# Altium PCB GPIOmodule.PcbDoc
Units mm, origin at the board's own origin, x right, y up, seen from the top; angles counter-clockwise.
Board outline 106.98 x 52.1 mm, 2 copper layers (Top Layer, Bottom Layer), stack 1.58 mm thick; 38 components, 54 nets, 222 pads, 24 vias.
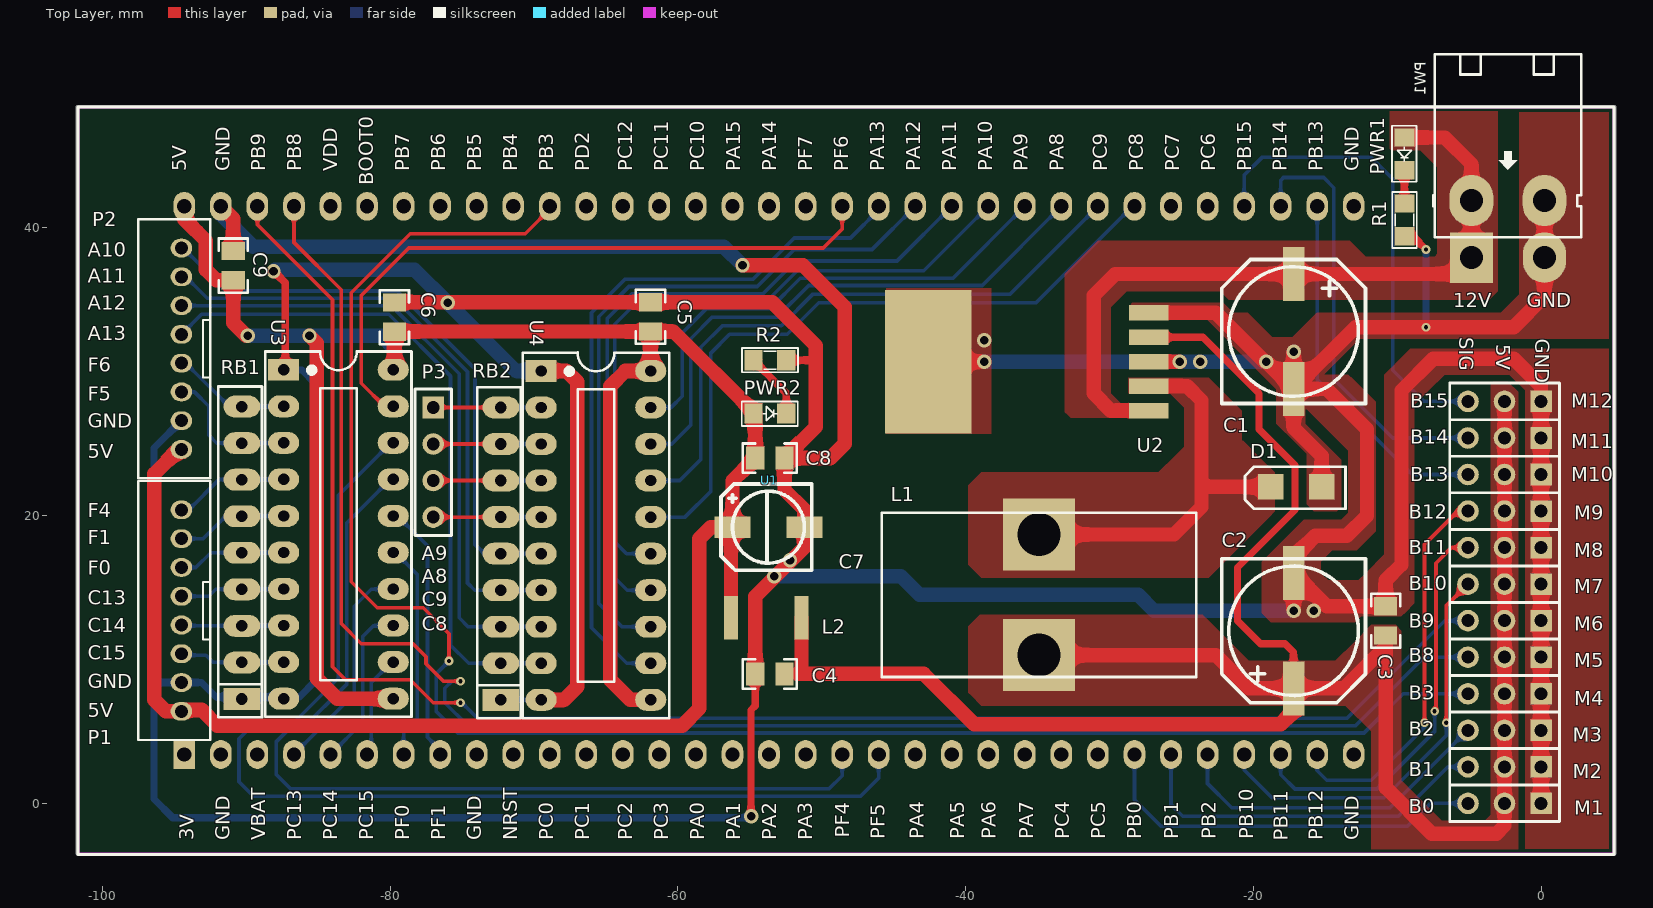
[diagram p0: Top Layer view]
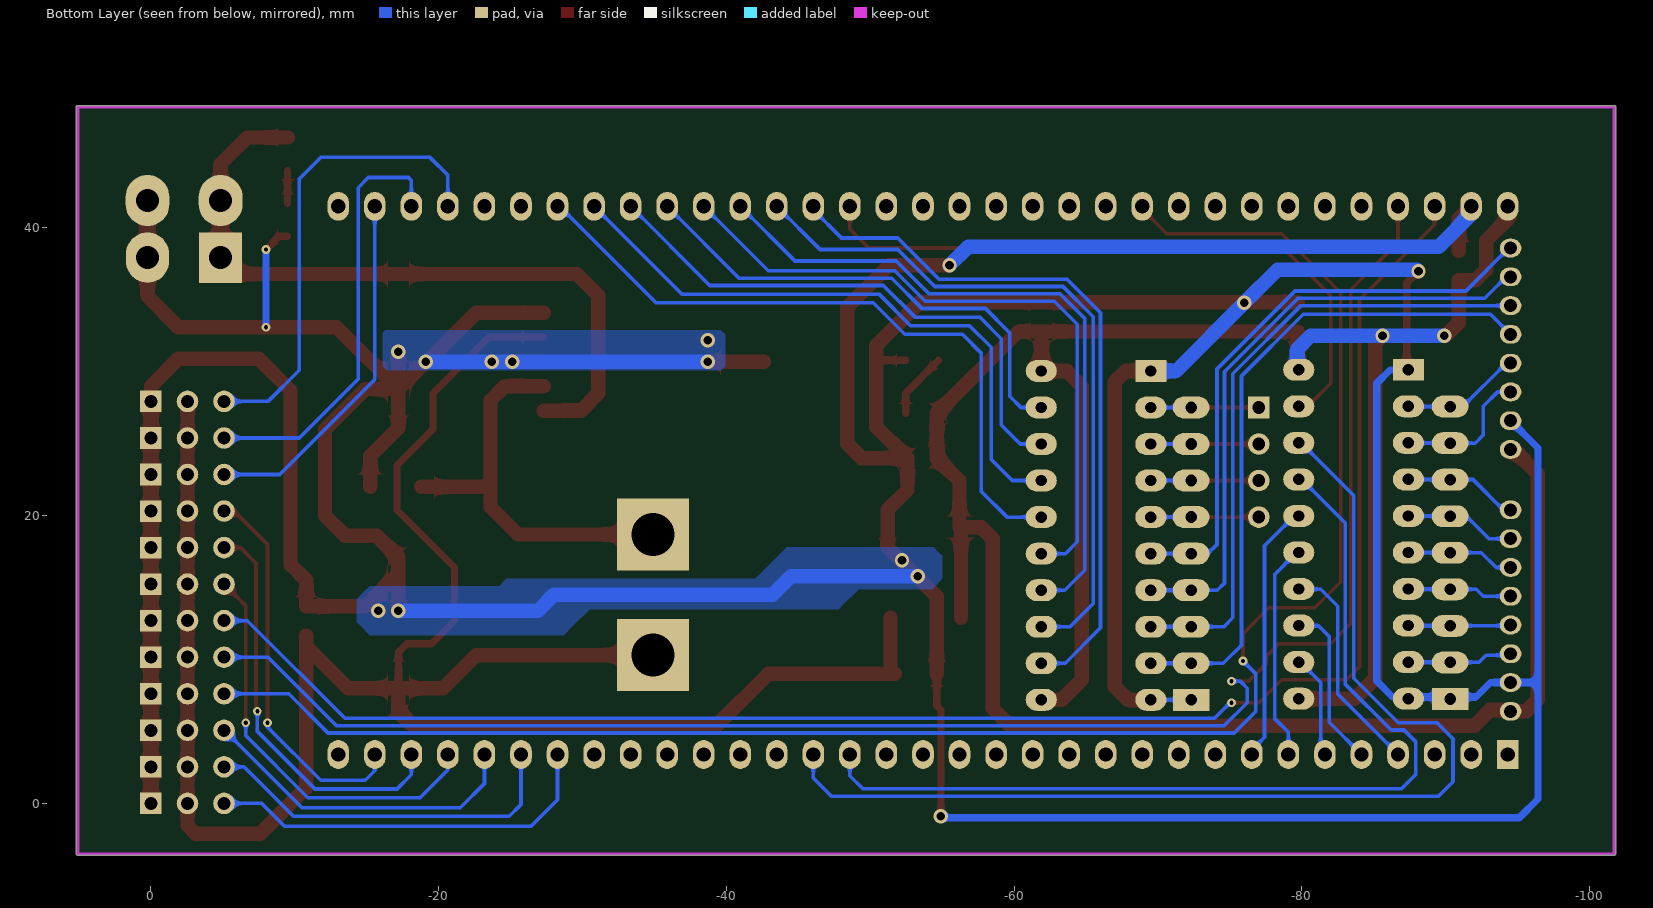
[diagram p1: Bottom Layer view, seen from below]

## Layer stack, top to bottom
Top Solder: solder mask 0.0102, Solder Resist, Dk 3.5
Top Layer: signal copper 0.0356
Dielectric 1: dielectric 1.5086, FR-4, Dk 4.8
Bottom Layer: signal copper 0.0356
Bottom Solder: solder mask 0.0102, Solder Resist, Dk 3.5

## Board outline
-101.7,-3.602 cw(c-101.7,-3.5) -101.8,-3.482 -101.8,48.382 cw(c-101.7,48.4) -101.7,48.502 5.08,48.502 cw(c5.08,48.4) 5.182,48.4 5.182,-3.5 cw(c5.08,-3.5) 5.08,-3.602

## Design rules (kind name [scope] priority, off if disabled: settings)
Clearance Clearance_1 [InNet('GND')] p1: gap=0.254
Clearance cutout [IsRegion] p2: gap=0.2
Clearance keepout [OnLayer('Keep-Out Layer')] p3: gap=0.2
Clearance [All] p4: gap=0.254
HoleSize [All] p1: absolutevalues=TRUE maxlimit=5 minlimit=0.01 maxpercent=80.000 minpercent=20.000
MinimumSolderMaskSliver [All] p1: minsoldermaskwidth=0.01
PolygonConnect [All] p1: connectstyle=Direct reliefconductorwidth=0.254 reliefentries=4 polygonreliefangle="90 Angle" airgapwidth=0.254
RoutingVias [All] p1: holewidth=0.3 width=0.6 viastyle="Through Hole" minholewidth=0.3 minwidth=0.6 maxholewidth=5 maxwidth=5
SilkToSilkClearance [All] p1: silktosilkclearance=0.1
SilkToSolderMaskClearance [IsPad] p1: minsilkscreentomaskgap=0.01 clearancetoexposedcopper=TRUE
SolderMaskExpansion [All] p1: expansion=0.102
Width [All] p1: maxlimit=5 minlimit=0.254 preferedwidth=0.254
26 further rules are at their usual default settings.

## Components (designator, comment, footprint, x,y, rotation, side; value= is the part's Value field where it differs from the comment)
C1 "470uF" TU_NHOM_470uF_25V_MH -17.2,32.8 r180 top
C2 "470uF" TU_NHOM_470uF_25V_MH -17.2,12 r0 top
C3 "104" 0805_HV -10.8,12.684 r270 top
C4 "104" 0805_HV -53.6,9 r0 top
C5 "104" 0805_HV -61.9,33.816 r270 top
C6 "104" 0805_HV -79.7,33.8 r270 top
C7 "220uF" TU_NHOM_2.5_MH -53.7,19.2 r90 top
C8 "104" 0805_HV -53.6,24 r180 top
C9 "104" 0805_HV -90.9,37.384 r270 top
D1 "IN5822" SOD123 -16.133,21.365 r0 top
L1 "100uF" IND_2118-V-RC -34.9,14.5 r270 top locked
L2 "680uF" "Inductor 4.5x5" -53.6,13 r0 top
M1 "Header 3" HDR1X3 0,0 r180 top
M2 "Header 3" HDR1X3 0,2.54 r180 top
M3 "Header 3" HDR1X3 0,5.08 r180 top
M4 "Header 3" HDR1X3 0,7.62 r180 top
M5 "Header 3" HDR1X3 0,10.16 r180 top
M6 "Header 3" HDR1X3 0,12.7 r180 top
M7 "Header 3" HDR1X3 0,15.24 r180 top
M8 "Header 3" HDR1X3 0,17.78 r180 top
M9 "Header 3" HDR1X3 0,20.32 r180 top
M10 "Header 3" HDR1X3 0,22.86 r180 top locked
M11 "Header 3" HDR1X3 0,25.4 r180 top locked
M12 "Header 3" HDR1X3 0,27.94 r180 top locked
P1 "Header 8" HEADER2M_8P -94.5,13.4 r90 top locked
P2 "Header 8" HEADER2M_8P -94.5,31.6 r90 top locked
P3 "Header 4" HDR1X4 -77,27.52 r270 top
PW1 "CON 2 EDG 5.08_MH" "CON 2 EDG 5.08" -2.3,41.9 r0 top (schematic designator CON1)
PWR1 "LED3" LED_0805 -9.5,45.143 r270 top
PWR2 "LED3" LED_0805 -53.6,27.1 r0 top
R1 "2.2K" "Tro SMD 0805" -9.5,40.557 r90 top
R2 "2.2K" "Tro SMD 0805" -53.6,30.8 r180 top
RB1 "TRO_BANG_A09_MH" TRO_BANG_A09 -90.3,17.42 r90 top locked
RB2 "TRO_BANG_A09_MH" TRO_BANG_A09 -72.3,17.36 r90 top
U1 "STM32discovery" STM32discovery_kit -53.66,22.45 r0 top locked
U2 "LM2576HVS" TO263-5 -27.3,30.7 r90 top locked
U3 "74HC573" DIP20 -83.615,18.71 r270 top
U4 "74HC573" DIP20 -65.715,18.63 r270 top

## Footprints (in the part's own frame and the unit in brackets; to place one, negate y for a bottom-side part, rotate by r counter-clockwise, add the part's x,y. Pads: shape width x height; smd on the part's side, far side on the other; paste and mask are expansions set on the pad)
0805_HV [mil] "0805 with 30mil clearance between pads"
  rect 50x63 smd: 1(-40,0) 2(40,0)
  silkscreen extent -74,-40 74,40, body extent -43,-29 43,29, height 57
"CON 2 EDG 5.08" [mil]
  oval 120x140 hole 62.99: 1(-100,0) 2(100,0)
  silkscreen extent -205,-100 200,400, body extent -197,-73 197,399, height 79
DIP20 [mil]
  rect 60x85 hole 31: 1(-450,-149)
  oval 60x85 hole 31: 2(-350,-149) 3(-250,-149) 4(-150,-149) 5(-50,-149) 6(50,-149) 7(150,-149) 8(250,-149) 9(350,-149) 10(450,-149) 11(450,151) 12(350,151) 13(250,151) 14(150,151) 15(50,151) 16(-50,151) 17(-150,151) 18(-250,151) 19(-350,151) 20(-450,151)
  silkscreen extent -500,-199 500,201, body extent -541,-167 495,173, height 155
HDR1X3 [mm] "Connector; Header; 3 Position"
  rect 1.5x1.5 hole 0.9: 1(0,0)
  round 1.5 hole 0.9: 2(2.54,0) 3(5.08,0)
  silkscreen extent -1.27,-1.27 6.35,1.27
HDR1X4 [mm] "Connector; Header; 4 Position"
  rect 1.5x1.5 hole 0.9: 1(0,0)
  round 1.5 hole 0.9: 2(2.54,0) 3(5.08,0) 4(7.62,0)
  silkscreen extent -1.27,-1.27 8.89,1.27
HEADER2M_8P [mm]
  oval 1.3x1.5 hole 0.9 mask+0.001: 1(-7,0) 2(-5,0) 3(-3,0) 4(-1,0) 5(1,0) 6(3,0) 7(5,0) 8(7,0)
  silkscreen extent -9,-2 9,3
IND_2118-V-RC [mm] "INDUCTOR,2 LEAD,VERTICAL MOUNT,8.382mm PITCH,TH"
  rect 5x5 hole 3: 1(-4.191,0) 2(4.191,0)
  silkscreen extent -5.72,-10.92 5.72,10.92, body extent -5.72,-10.92 5.72,10.92, height 21.84
"Inductor 4.5x5" [mm]
  rect 1x3 smd: 1(2.2,-0.1) 2(-2.7,-0.1)
  body extent -2.6,-2.6 2.2,2.2, height 2
LED_0805 [mil]
  rect 50x55 smd: 1(-45,0) 2(45,0)
  silkscreen extent -77,-34 76,33, body extent -41,-16 41,20, height 33
SOD123 [mil]
  rect 70x70 smd: 1(35,25) 2(-105,25)
  silkscreen extent -175,-35 100,80, body extent -139,-29 66,73, height 95
STM32discovery_kit [mm]
  rect 1.5x2 hole 1 paste+0: 1(-40.64,-19.05)
  oval 1.5x2 hole 1 paste+0: 2(-38.1,-19.05) 3(-35.56,-19.05) 4(-33.02,-19.05) 5(-30.48,-19.05) 6(-27.94,-19.05) 7(-25.4,-19.05) 8(-22.86,-19.05) 9(-20.32,-19.05) 10(-17.78,-19.05) 11(-15.24,-19.05) 12(-12.7,-19.05) 13(-10.16,-19.05) 14(-7.62,-19.05) 15(-5.08,-19.05) 16(-2.54,-19.05) 17(0,-19.05) 18(2.54,-19.05) 19(5.08,-19.05) 20(7.62,-19.05) 21(10.16,-19.05) 22(12.7,-19.05) 23(15.24,-19.05) 24(17.78,-19.05) 25(20.32,-19.05) 26(22.86,-19.05) 27(25.4,-19.05) 28(27.94,-19.05) 29(30.48,-19.05) 30(33.02,-19.05) 31(35.56,-19.05) 32(38.1,-19.05) 33(40.64,-19.05) 34(40.64,19.05) 35(38.1,19.05) 36(35.56,19.05) 37(33.02,19.05) 38(30.48,19.05) 39(27.94,19.05) 40(25.4,19.05) 41(22.86,19.05) 42(20.32,19.05) 43(17.78,19.05) 44(15.24,19.05) 45(12.7,19.05) 46(10.16,19.05) 47(7.62,19.05) 48(5.08,19.05) 49(2.54,19.05) 50(0,19.05) 51(-2.54,19.05) 52(-5.08,19.05) 53(-7.62,19.05) 54(-10.16,19.05) 55(-12.7,19.05) 56(-15.24,19.05) 57(-17.78,19.05) 58(-20.32,19.05) 59(-22.86,19.05) 60(-25.4,19.05) 61(-27.94,19.05) 62(-30.48,19.05) 63(-33.02,19.05) 64(-35.56,19.05) 65(-38.1,19.05) 66(-40.64,19.05)
  silkscreen extent -48.04,-26 58.74,25.95
TO263-5 [mm] "LM2576-SMD"
  rect 1.07x2.75 smd: 1(-3.4,-0.025) 2(-1.7,-0.025) 3(0,-0.025) 4(1.7,-0.025) 5(3.4,-0.025)
  rect 10x6 smd: 6(0,15.289)
  body extent -5,-0.38 5,15.29, height 4.79
"Tro SMD 0805" [mil]
  rect 50x55 smd: 1(-45,0) 2(45,0)
  silkscreen extent -77,-34 76,33, body extent -62,-28 56,27, height 21
TRO_BANG_A09 [mil] "R SIP8, 9 Pin"
  rect 60x100 hole 32: 1(-400,0)
  oval 60x100 hole 32: 2(-300,0) 3(-200,0) 4(-100,0) 5(0,0) 6(100,0) 7(200,0) 8(300,0) 9(400,0)
  silkscreen extent -450,-55 455,65, body extent -443,-44 443,5, height 259
TU_NHOM_2.5_MH [mm]
  rect 1.5x2.5 smd: 1(0,2.5) 2(0,-2.5)
  silkscreen extent -3,-3 3,3.3, body extent -3.3,-3.5 3.3,3.5, height 8.11
TU_NHOM_470uF_25V_MH [mm]
  rect 1.5x3.75 smd: 1(0,-4) 2(0,4)
  silkscreen extent -5,-5 5,5, body extent -5.15,-5.5 5.15,5.5, height 7.9

## Part data
C1 C2: library part TU_NHOM_470uF_25V_MH, "TU_NHOM_470uF_25V_MH"
C3 C4 C5 C6 C8 C9: library part CM, "Cap SMD"
C7: library part TU_NHOM_220uF_25V_MH, "TU_NHOM_220uF_25V_MH"
D1: library part "Diode S4 SOD123 ( 1N5819 SOD123)_MH", "Diode S4 SOD123 ( 1N5819 SOD123)"
L1: library part "Inductor Lm2576_MH", "cuon cam"
L2: library part "Inductor 4.5x5_MH"
M1 M2 M3 M4 M5 M6 M7 M8 M9 M10 M11 M12: "Header, 3-Pin"
P1 P2: "Header, 8-Pin"
P3: "Header, 4-Pin"
PW1: "CON 2 EDG 5.08 (xanh cong)"
PWR1 PWR2: library part "LED SMD_0805_MH", "LED 3mm"
R1 R2: library part TRO_SMD_0805_MH, "TRO_SMD_0805_MH"
U1: library part STM32Discovery_kit
U2: library part "LM2576HVS-5.0V BUCK 5V 3A TO263-5 _MH", "LM2576HVS-5.0V BUCK 5V 3A TO263-5 _MH"
U3 U4: library part "74HC573 DIP20 IC Flip-Flop_MH", "Octal D-Type Latch with 3-State Output Non-Inverting"

## Free pads (board coordinates)
  rect 3x3.5 hole 1.6 paste+0: 1(-4.841,37.935)
  oval 3x3.5 hole 1.6 paste+0: 2(0.239,37.935)

## Via types
v1: diameter 1, hole 0.6, Top Layer to Bottom Layer, tented both sides, 16 vias
v2: diameter 0.6, hole 0.3, Top Layer to Bottom Layer, tented both sides, 8 vias

## Nets (pads, with @x,y where several pads share a name; then routed paths per layer and width w, separated by ;. In a path a pad name is that pad's centre, name@x,y a point inside that pad or via, vN(x,y) a via of type N, cw(c..) or ccw(c..) an arc to the next point about the centre after c; other vN are vias at no path point)
5V: C5.2 C6.2 C7.1 C8.2 C9.2 L2.2 P1.1 P2.1 PWR2.1 U1.66 U3.11 U3.20 U4.11 U4.20 | length 200.3
  Top Layer w1: P1.1 -95.6,6.4 -96.4,7.2 -96.4,22.9 -94.7,24.6 P2.1 ; P1.1@-94.5,6.5 -93.1,6.5 -92,5.4 -59.7,5.4 -58.5,6.6 -58.5,18.4 -57.7,19.2 C7.1 ; U1.66 -94.3,40.6 -92.8,39.1 -92.8,37.1 -92.068,36.368 C9.2 -90.9,33.4 v1@-90,32.5 ; v1(-85.6,32.5) -85.1,32 -85.1,8.7 -83.67,7.27 U3.11@-79.665,7.27 ; U3.20@-79.665,30.13 -79.7,30.165 C6.2 -79.684,32.8 C5.2 ; U4.11 -63.3,7.2 -64.7,8.6 -64.7,29 -63.64,30.06 U4.20 -61.9,30.08 C5.2 ; L2.2 -56.3,19.1 C7.1 ; C5.2 -60.3,32.8 -54.616,27.116 C8.2 -56.2,22.416 C7.1
  Bottom Layer w1: v1(-89.9,32.5) v1(-85.6,32.5) -80.6,32.5 -79.665,31.565 U3.20@-79.665,30.13
12V: C1.1 pad.1 PW1.1 PWR1.1 U2.1 | length 50.4
  Top Layer w1: U2.1@-27.3,27.3 -29.9,27.3 -31.1,28.5 -31.1,35.3 -29.6,36.8 C1.1 -5.976,36.8 pad.1 pad.1 PW1.1 -4.84,44.44 -6.686,46.286 PWR1.1
GND: C1.2 C2.2 C3.1 C4.1 C5.1 C6.1 C7.2 C8.1 C9.1 D1.1 M1.1 M2.1 M3.1 M4.1 M5.1 M6.1 M7.1 M8.1 M9.1 M10.1 M11.1 M12.1 P1.2 P2.2 pad.2 PW1.2 R1.1 R2.1 RB1.1 RB2.1 U1.65 U2.3 U2.5 U2.6 U3.1 U3.10 U4.1 U4.10 | length 500.2
  Top Layer w0.5: v1(-88.1,37) -87.285,36.185 U3.1@-87.285,30.13 ; v1(-54.9,-0.9) -54.914,-0.886 -54.914,6.486 -54.616,6.784 C4.1 ; R2.1 -50.4,30.8 ; R1.1 -8.914,39.414 v2(-8,38.5)
  Top Layer w1: U1.65 -90.9,40.64 C9.1 ; C6.1 -79.684,34.832 C5.1 -53.432,34.832 -50.4,31.8 -50.4,30.8 -50.4,26.184 C8.1 ; U4.10 -67.9,7.2 -67,8.1 -67,29.3 -67.76,30.06 U4.1 ; v1(-55.5,37.4) -51.3,37.4 -48.4,34.5 -48.4,25 -49.4,24 C8.1 ; C4.1 -54.616,14.384 -51.2,17.8 C7.2 -51.2,20.4 -52.584,21.784 C8.1 ; U2.6 v1(-38.7,30.7) ; U2.3@-27.3,30.7 U2.3 v1(-25.1,30.7) ; U2.5@-27.3,34.1 U2.5 -22.6,34.1 -19.2,30.7 v1(-19.1,30.7) C1.2 ; v1(-17.2,13.4) C2.2 ; v1(-17.2,31.4) C1.2 ; D1.1 -15.244,24.144 -17.2,26.1 C1.2 ; M1.1 M2.1 M3.1 M4.1 M5.1 M6.1 M7.1 M8.1 M9.1 M10.1 M11.1 M12.1 0,29 -1.9,30.9 -7.5,30.9 -9.7,28.7 -9.7,16.6 -10.8,15.5 C3.1 -14.9,13.7 C2.2 ; PW1.2 0.24,35.24 -1.9,33.1 v2(-8,33.1) -12.9,33.1 C1.2 ; C2.2 -17.2,17.1 -15.7,18.6 -13.5,18.6 -12.1,20 -12.1,26 -14.9,28.8 C1.2
  Bottom Layer w0.254: RB2.1@-72.5,7.2 RB2.1 U4.10
  Bottom Layer w0.5: P2.2 -96.4,24.7 -96.4,8.4 ; U3.1@-87.285,30.13 -86.13,30.13 -85.2,29.2 -85.2,8.5 -86.3,7.4 -92.1,7.4 -93.1,8.4 P1.2 -96.4,8.4 ; v1@-54.9,-1 -95.1,-1 -96.4,0.3 -96.4,8.4 ; v2(-8,33.1) v2(-8,38.5)
  Bottom Layer w1: U1.65 -91.76,40.96 -89.5,38.7 -56.8,38.7 v1(-55.5,37.4) ; v1@-88,37.1 -78.3,37.1 v1(-76,34.8) -71.26,30.06 U4.1 ; v1(-53.3,15.8) -44.5,15.8 -43.2,14.5 -28,14.5 -26.9,13.4 v1(-17.2,13.4) ; v1(-38.7,30.7) v1(-25.1,30.7) v1(-23.7,30.7) v1(-19.1,30.7)
  other v1: -15.8,13.4 -52.2,16.9 -38.7,32.2
MO_5V: C2.1 C3.2 C4.2 L1.2 L2.1 M1.2 M2.2 M3.2 M4.2 M5.2 M6.2 M7.2 M8.2 M9.2 M10.2 M11.2 M12.2 U2.4 | length 153.2
  Top Layer w0.5: U2.4 -23.5,32.4 -19.6,28.5 -19.6,26 -17.1,23.5 -17.1,20.4 -21.1,16.4 -21.1,12.7 -19.5,11.1 -17.8,11.1 -17.2,10.5 C2.1
  Top Layer w1: L2.1 -51.4,9.3 -51.7,9 -42.9,9 -39.4,5.5 -18.1,5.5 -17.2,6.4 C2.1 ; L1.2 -22.609,10.309 -20.3,8 C2.1 ; C3.2 -10.8,10.9 ; M12.2 M11.2 M10.2 M9.2 M8.2 M7.2 M6.2 M5.2 M4.2 M3.2 M2.2 M1.2 -2.54,-1.54 -3.1,-2.1 -7.6,-2.1 -10.8,1.1 -10.8,10.9 ; C2.1 -13.7,8 -10.8,10.9
NetD1_2: D1.2 L1.1 U2.2 | length 28.6
  Top Layer w1: L1.1 -25.509,18.691 -23.6,20.6 -23.6,22.4 ; U2.2@-27.3,29 U2.2 -24.6,29 -23.6,28 -23.6,22.4 ; D1.2 -23.2,22 -23.6,22.4
NetPWR1_2: PWR1.2 R1.2 | length 2.3
  Top Layer w0.5: R1.2 PWR1.2
NetPWR2_2: PWR2.2 R2.2 | length 4.6
  Top Layer w0.5: R2.2 -52.457,28.514 PWR2.2
PA4: U1.21
PA5: U1.22
PA6: U1.23
PA8: P3.2 RB2.8 U4.3 | length 7.7
  Top Layer w0.254: P3.2 RB2.8
  Bottom Layer w0.254: RB2.8@-72.5,24.98 RB2.8 U4.3
PA8O: U1.42 U4.18 | length 38.9
  Bottom Layer w0.254: U4.18 -60.42,24.98 -59.1,26.3 -59.1,32.3 -57.6,33.8 -53.1,33.8 -50.9,36 -38.84,36 U1.42
PA9: P3.1 RB2.9 U4.2 | length 7.7
  Top Layer w0.254: P3.1 RB2.9
  Bottom Layer w0.254: RB2.9@-72.5,27.52 RB2.9 U4.2
PA9O: U1.43 U4.19 | length 34.4
  Bottom Layer w0.254: U4.19 -60.48,27.52 -59.7,28.3 -59.7,32.7 -58,34.4 -53.6,34.4 -51.492,36.508 -40.872,36.508 U1.43
PA10: P2.8 RB2.5 U4.6 | length 40.9
  Bottom Layer w0.254: P2.8 -94.382,38.6 -91.398,35.616 -79.516,35.616 -74.1,30.2 -74.1,18 -73.46,17.36 RB2.5 U4.6
PA10O: U1.44 U4.15 | length 47.3
  Bottom Layer w0.254: U4.15 -63.56,17.36 -64.392,18.192 -64.392,33.308 -62.792,34.908 -53.81,34.908 -51.702,37.016 -42.904,37.016 U1.44
PA11: P2.7 RB2.4 U4.7 | length 42.6
  Bottom Layer w0.254: P2.7 -94.2,36.6 -92.708,35.108 -79.726,35.108 -74.62,30.002 -74.62,15.32 -74.12,14.82 RB2.4 U4.7
PA11O: U1.45 U4.14 | length 48.3
  Bottom Layer w0.254: U4.14 -63.52,14.82 -64.9,16.2 -64.9,33.7 -63.184,35.416 -54.084,35.416 -51.8,37.7 -44.76,37.7 U1.45
PA12: P2.6 RB2.3 U4.8 | length 44.2
  Bottom Layer w0.254: P2.6 -92,34.6 -79.937,34.6 -75.2,29.863 -75.2,12.9 -74.58,12.28 RB2.3 U4.8
PA12O: U1.46 U4.13 | length 49.4
  Bottom Layer w0.254: U4.13 -63.88,12.28 -65.492,13.892 -65.492,33.826 -63.394,35.924 -54.476,35.924 -51.9,38.5 -46.5,38.5 U1.46
PA13: P2.5 RB2.2 U4.9 | length 46.6
  Bottom Layer w0.254: P2.5 -93.1,34 -80.1,34 -75.8,29.7 -75.8,11 -74.54,9.74 RB2.2 U4.9
PA13O: U1.47 U4.12 | length 50.2
  Bottom Layer w0.254: U4.12 -63.54,9.74 -66,12.2 -66,34.1 -63.668,36.432 -54.768,36.432 -51.9,39.3 -48,39.3 -46.04,41.26 U1.47
PB0: M1.3 U1.27 | length 27.8
  Bottom Layer w0.254: U1.27 -28.26,0.26 -26.4,-1.6 -9.3,-1.6 -7.7,0 M1.3
PB1: M2.3 U1.28 | length 25.9
  Bottom Layer w0.254: U1.28 -25.72,-0.08 -24.9,-0.9 -9.9,-0.9 -6.46,2.54 M2.3
PB2: M3.3 U1.29 | length 23
  Bottom Layer w0.254: U1.29 -23.18,1.38 -21.5,-0.3 -10.5,-0.3 -5.12,5.08 M3.3
PB3: M4.3 U1.56 | length 124
  Top Layer w0.254: v2(-75.9,9.9) -75.9,11.8 -77.7,13.6 -80.9,13.6 -82.7,15.4 -82.7,35.5 -78.6,39.6 -70.6,39.6 -68.9,41.3 U1.56
  Bottom Layer w0.254: v2(-75.9,9.9) -76.8,9 -76.8,6.4 -75.292,4.892 -12.308,4.892 -9.58,7.62 M4.3
PB8: M5.3 U1.63 | length 116.7
  Top Layer w0.254: U1.63 -86.68,38.98 -83.4,35.7 -83.4,12.5 -82,11.1 -78.4,11.1 -77.5,10.2 -77.5,9.7 -76.3,8.5 v2(-75.1,8.5)
  Bottom Layer w0.254: v2(-75.1,8.5) -75.7,8.5 -76.2,8 -76.2,7 -74.608,5.408 -59.392,5.408 -59.384,5.4 -12.9,5.4 -8.14,10.16 M5.3
PB9: M6.3 U1.64 | length 117.4
  Top Layer w0.254: U1.64 -89.22,40.22 -84,35 -84,9.5 -83.1,8.6 -78.6,8.6 -77,7 v2(-75.1,7)
  Bottom Layer w0.254: v2(-75.1,7) -75,7 -73.916,5.916 -13.484,5.916 -6.7,12.7 M6.3
PB10: M7.3 U1.30 | length 28.9
  Top Layer w0.254: v2(-6.6,5.6) -6.6,13.72 M7.3
  Bottom Layer w0.254: U1.30 -20.64,2.34 -18.7,0.4 -10.9,0.4 -6.6,4.7 v2(-6.6,5.6)
PB11: M8.3 U1.31 | length 28.6
  Top Layer w0.254: v2(-7.4,6.4) -7.3,6.5 -7.3,16.7 -6.22,17.78 M8.3
  Bottom Layer w0.254: U1.31 -18.1,2 -17.1,1 -11.4,1 -7.4,5 v2(-7.4,6.4)
PB12: M9.3 U1.32 | length 27.1
  Top Layer w0.254: v2(-8.1,5.6) -8.1,18 -5.78,20.32 M9.3
  Bottom Layer w0.254: U1.32 -15.56,2.26 -14.9,1.6 -11.8,1.6 -8.1,5.3 v2(-8.1,5.6)
PB13: M10.3 U1.35 | length 25.3
  Bottom Layer w0.254: U1.35 -15.56,29.46 -8.96,22.86 M10.3
PB14: M11.3 U1.36 | length 30.2
  Bottom Layer w0.254: U1.36 -18.1,43.3 -17.9,43.5 -15.1,43.5 -14.4,42.8 -14.4,29.5 -10.3,25.4 M11.3
PB15: M12.3 U1.37 | length 33
  Bottom Layer w0.254: U1.37 -20.64,43.66 -19.4,44.9 -11.8,44.9 -10.3,43.4 -10.3,30.1 -8.14,27.94 M12.3
PC8: P3.4 RB2.6 U4.5 | length 7.7
  Top Layer w0.254: P3.4 RB2.6
  Bottom Layer w0.254: RB2.6@-72.5,19.9 RB2.6 U4.5
PC8O: U1.40 U4.16 | length 48.2
  Bottom Layer w0.254: U4.16 -59.5,19.9 -57.7,21.7 -57.7,31.3 -56.4,32.6 -52.4,32.6 -50.2,34.8 -35.1,34.8 -28.4,41.5 U1.40
PC9: P3.3 RB2.7 U4.4 | length 7.7
  Top Layer w0.254: P3.3 RB2.7
  Bottom Layer w0.254: RB2.7@-72.5,22.44 RB2.7 U4.4
PC9O: U1.41 U4.17 | length 43.5
  Bottom Layer w0.254: U4.17 -59.86,22.44 -58.4,23.9 -58.4,31.7 -56.9,33.2 -52.8,33.2 -50.6,35.4 -36.9,35.4 U1.41
PC13: P1.5 RB1.4 U3.7 | length 7.4
  Bottom Layer w0.254: P1.5 -92.6,14.4 -92.11,14.89 U3.7@-87.285,14.89
PC13O: U1.4 U3.14 | length 15.4
  Bottom Layer w0.254: U1.4 -86.68,3.42 -82.492,7.608 -82.492,13.708 -81.31,14.89 U3.14@-79.665,14.89
PC14: P1.4 RB1.3 U3.8 | length 7.2
  Bottom Layer w0.254: P1.4 -94.45,12.35 U3.8@-87.285,12.35
PC14O: U1.5 U3.13 | length 11.7
  Bottom Layer w0.254: U1.5 -81.9,5.64 -81.9,11.6 -81.15,12.35 U3.13@-79.665,12.35
PC15: P1.3 RB1.2 U3.9 | length 7.5
  Bottom Layer w0.254: P1.3 -94.4,10.3 -92.8,10.3 -92.31,9.81 U3.9@-87.285,9.81
PC15O: U1.6 U3.12 | length 7.3
  Bottom Layer w0.254: U1.6 -81.3,3.7 -81.3,8.4 -79.89,9.81 U3.12@-79.665,9.81
PF0: P1.6 RB1.5 U3.6 | length 7.6
  Bottom Layer w0.254: P1.6 -93.5,16.4 -92.47,17.43 U3.6@-87.285,17.43
PF0O: U1.7 U3.15 | length 15.1
  Bottom Layer w0.254: U3.15@-79.665,17.43 -79.63,17.43 -78.1,15.9 -78.1,5.9 -79.06,4.94 U1.7
PF1: P1.7 RB1.6 U3.5 | length 7.9
  Bottom Layer w0.254: P1.7 -93,18.4 -91.43,19.97 U3.5@-87.285,19.97
PF1O: U1.8 U3.16 | length 18
  Bottom Layer w0.254: U3.16@-79.665,19.97 -79.47,19.97 -77.4,17.9 -77.4,4.6 -76.52,3.72 U1.8
PF4: P1.8 RB1.7 U3.4 | length 8.1
  Bottom Layer w0.254: P1.8 -94,20.4 -91.89,22.51 U3.4@-87.285,22.51
PF4O: U1.19 U3.17 | length 66.2
  Bottom Layer w0.254: U3.17@-79.665,22.51 -79.99,22.51 -83,19.5 -83,8.3 -86.2,5.1 -87.1,5.1 -87.9,4.3 -87.9,2 -86.908,1.008 -49.5,1.008 -48.58,1.928 U1.19
PF5: P2.3 RB1.8 U3.3 | length 9.9
  Bottom Layer w0.254: P2.3 -93.6,28.6 -92.6,27.6 -92.6,25.6 -92.04,25.04 RB1.8 -90.29,25.05 U3.3@-87.285,25.05
PF5O: U1.20 U3.18 | length 76.8
  Bottom Layer w0.254: U3.18@-79.665,25.05 -79.95,25.05 -83.6,21.4 -83.6,8.7 -86.692,5.608 -89.392,5.608 -90.5,4.5 -90.5,1.5 -89.5,0.5 -47.3,0.5 -46.04,1.76 U1.20
PF6: P2.4 RB1.9 U3.2 | length 8.5
  Bottom Layer w0.254: P2.4 -94.2,30.6 -91.18,27.58 RB1.9 -87.295,27.58 U3.2@-87.285,27.59
PF6O: U1.48 U3.19 | length 46
  Top Layer w0.254: U3.19@-79.665,27.59 -80.39,27.59 -82,29.2 -82,35.3 -78.7,38.6 -49.9,38.6 -48.58,39.92 U1.48
pads on no net: U1.1 U1.2 U1.3 U1.9 U1.10 U1.11 U1.12 U1.13 U1.14 U1.15 U1.16 U1.17 U1.18 U1.24 U1.25 U1.26 U1.33 U1.34 U1.38 U1.39 U1.49 U1.50 U1.51 U1.52 U1.53 U1.54 U1.55 U1.57 U1.58 U1.59 U1.60 U1.61 U1.62

## Polygon pours and split planes (outlines as drawn)
12V on Top Layer "Bottom Layer-No Net" (solid, pour order 4): -10.5,45.5 -10.5,48.4 -3,48.4 -3,35.6 -3.6,35 -13.2,35 -21.7,35 -22.3,35.6 -24.5,35.6 -28.8,35.6 -29.7,34.7 -29.9,34.5 -29.9,31.5 -29.9,28.5 -29.6,28.2 -29.2,27.8 -28,27.8 -26.2,27.8 -26.1,27.7 -26.1,26.8 -32.7,26.8 -32.9,27 -33.1,27.2 -33.1,31.9 -33.1,36.8 -32.4,37.5 -30.8,39.1 -18.3,39.1 -13.3,39.1 -12.2,38 -9.1,38 -7.4,38 -7.2,38.2 -7.2,43.7 -7.2,44.2 -8,45 -8.4,45.4 -9.2,45.4 -10.4,45.4 -10.5,45.5
GND on Top Layer "Bottom Layer-No Net" (solid, pour order 6): -1.5,48.4 -1.5,36.2 -1.5,35.4 -2.5,34.4 -2.8,34.1 -5.5,34.1 -15.6,34.1 -17.3,32.4 -18.5,32.4 -18.7,32.4 -19.6,33.3 -20.4,34.1 -21.2,34.1 -21.4,34.1 -22,34.7 -22.1,34.8 -27.9,34.8 -28.4,34.8 -28.6,34.6 -28.6,33.7 -28.5,33.6 -23.2,33.6 -20.2,30.6 -18.4,28.8 -18.4,26.6 -18.4,26.4 -17.1,25.1 -16.3,24.3 -16.3,21.4 -16.3,20.8 -15.9,20.4 -15.8,20.3 -14.2,20.3 -13.9,20.6 -13.9,21.4 -13.9,23.9 -15.1,25.1 -16.4,26.4 -16.4,27.3 -16.4,28.5 -15.2,29.7 -12.6,32.3 -9,32.3 5.1,32.3 5.1,48.38 5.08,48.4
GND on Top Layer "Bottom Layer-No Net" (solid, pour order 8): -17.3,27.4 -16.3,27.4 -15.7,26.8 -13.4,24.5 -13.4,22 -13.4,20.2 -13.9,19.7 -15.5,19.7 -16.5,19.7 -17.6,18.6 -19.4,16.8 -19.4,14.3 -19.4,13.2 -18.9,12.7 -18.8,12.6 -16.2,12.6 -12.9,12.6 -12.5,13 -11.3,13 -9.7,13 -9.4,13.3 -8.8,13.9 -8.8,17.2 -8.8,27.7 -7.8,28.7 -6.7,29.8 -3.9,29.8 -2.2,29.8 -1.1,28.7 -1.1,26.1 -1.1,-3.6 5.113,-3.6 5.174,-3.539 5.174,31.506 5.08,31.6 -9.1,31.6 -10.8,29.9 -10.9,29.8 -10.9,27.7 -10.9,17.3 -12.2,16 -12.7,15.5 -14.3,15.5 -14.8,15.5 -15.2,15.9 -15.3,16 -15.3,16.4 -15.3,16.8 -15.1,17 -14.5,17.6 -13.3,17.6 -12.8,17.6 -11.7,18.7 -11.5,18.9 -11.5,20 -11.5,27.9 -13.1,29.5 -13.4,29.8 -16.6,29.8
MO_5V on Top Layer "Bottom Layer-No Net" (solid, pour order 10): -3.5,29.1 -3.5,-0.8 -3.9,-1.2 -5.6,-1.2 -6.9,-1.2 -7.5,-0.6 -9.7,1.6 -9.7,5.2 -9.7,12 -10.1,12.4 -11.2,12.4 -11.8,12.4 -13,11.2 -14.3,9.9 -17.2,9.9 -20.3,9.9 -21.7,11.3 -23.5,13.1 -34.6,13.1 -39,13.1 -39.8,12.3 -39.8,10 -39.8,7.7 -39.6,7.5 -38.9,6.8 -36.8,6.8 -13.6,6.8 -11.8,5 -11.8,2 -11.8,-3.6 -1.6,-3.6 -1.6,28.6 -2.3,29.3 -3.3,29.3
NetD1_2 on Top Layer "Bottom Layer-No Net" (solid, pour order 12): -28.7,29.6 -24.5,29.6 -23.1,29.6 -22.5,29 -20.8,27.3 -20.8,25.2 -20.7,25.2 -19.5,24 -18.5,23 -18.5,21.1 -18.5,20.3 -18.9,19.9 -23.1,15.7 -34.3,15.7 -38.9,15.7 -39.8,16.6 -39.8,22.1 -38.9,23 -35.2,23 -26.6,23 -25.4,24.2 -24.8,24.8 -24.8,26.5 -24.8,27.5 -25.4,28.1 -25.8,28.5 -26.8,28.5 -28.7,28.5
GND on Top Layer "Bottom Layer-No Net" (solid, pour order 14): -45.5,35.8 -38.2,35.8 -38.2,31.8 -38.2,25.7 -45.5,25.7
GND on Bottom Layer "Bottom Layer-No Net" (solid, pour order 9): -53,17.8 -54,17.8 -54.4,17.8 -54.7,17.5 -55,17.2 -55,16 -55,15.6 -54.4,15 -54.3,14.9 -52.7,14.9 -49.2,14.9 -48.1,13.8 -47.8,13.5 -38.1,13.5 -30.5,13.5 -29.3,12.3 -28.7,11.7 -16.8,11.7 -15.2,11.7 -14.5,12.4 -14.3,12.6 -14.3,13.6 -14.3,14.2 -14.8,14.7 -15.2,15.1 -18.1,15.1 -24.2,15.1 -24.7,15.6 -32,15.6 -37.4,15.6 -42,15.6 -44.2,17.8 -44.4,17.8 -53.2,17.8
GND on Bottom Layer "Bottom Layer-No Net" (solid, pour order 16): -16.4,32.9 -39.6,32.9 -39.9,32.6 -39.9,31.5 -39.9,30.4 -39.6,30.1 -38.9,30.1 -16.4,30.1 -16.1,30.4 -16.1,31.8 -16.1,32.7 -16.3,32.9

## Keep-outs
Keep-Out Layer:
  lines w0.2: -101.7,-3.5 -101.7,48.4
  lines w0.203: -101.7,-3.5 5.08,-3.5 5.08,48.4 -101.7,48.4

## Silkscreen, mask and mechanical layers (free items; w line width, h text height)
Top Overlay:
  text "A10" at -101,38 h1
  text "A11" at -101,36.2 h1
  text "12V" at -6.1,34.5 h1
  text "GND" at -1,34.5 h1
  text "A12" at -101,34.3 h1
  text "SIG" at -5.7,32.4 h1 r270
  text "GND" at -0.4,32.3 h1 r270
  text "A13" at -101,32.2 h1
  text "5V" at -3.1,31.9 h1 r270
  text "F6" at -101,30 h1
  text "F5" at -101,28 h1
  text "B15" at -9.1,27.5 h1
  text "GND" at -101,26.1 h1
  text "B14" at -9.1,25 h1
  text "5V" at -101,24 h1
  text "B13" at -9.1,22.4 h1
  text "F4" at -101,19.9 h1
  text "B12" at -9.2,19.8 h1
  text "F1" at -101,18 h1
  text "B11" at -9.2,17.3 h1
  text "A9" at -77.8,16.9 h1
  text "F0" at -101,15.9 h1
  text "A8" at -77.8,15.3 h1
  text "B10" at -9.2,14.8 h1
  text "C13" at -101,13.8 h1
  text "C9" at -77.8,13.7 h1
  text "B9" at -9.2,12.2 h1
  text "C8" at -77.8,12 h1
  text "C14" at -101,11.9 h1
  text "C15" at -101,10 h1
  text "B8" at -9.2,9.8 h1
  text "GND" at -101,8 h1
  text "B3" at -9.2,7.2 h1
  text "5V" at -101,6 h1
  text "B2" at -9.2,4.7 h1
  text "B1" at -9.2,1.9 h1
  text "B0" at -9.2,-0.7 h1
  text "PB2" at -22.6,-2.5 h1 r90
  text "PB10" at -20,-2.5 h1 r90

## Text inside footprints (layer, text, board x,y; h text height)
L1: Mechanical 17 "LEAD LENGTH:12.7MM" at -29.566,26.438 h1 r270
U1: Top Overlay "PA8" at -33.16,43.95 h1 r90; Top Overlay "PA9" at -35.66,43.95 h1 r90; Top Overlay "GND" at -91.16,43.95 h1 r90; Top Overlay "5V" at -94.16,43.95 h1 r90; Top Overlay "PB9" at -88.66,43.95 h1 r90; Top Overlay "PB8" at -86.16,43.95 h1 r90; Top Overlay "VDD" at -83.66,43.95 h1 r90; Top Overlay "BOOT0" at -81.16,42.95 h1 r90; Top Overlay "PB7" at -78.66,43.95 h1 r90; Top Overlay "PB6" at -76.16,43.95 h1 r90; Top Overlay "PB5" at -73.66,43.95 h1 r90; Top Overlay "PB4" at -71.16,43.95 h1 r90; Top Overlay "PB3" at -68.66,43.95 h1 r90; Top Overlay "PD2" at -66.16,43.95 h1 r90; Top Overlay "PC12" at -63.16,43.95 h1 r90; Top Overlay "PC11" at -60.66,43.95 h1 r90; Top Overlay "PC10" at -58.16,43.95 h1 r90; Top Overlay "PF7" at -50.66,43.95 h1 r90; Top Overlay "PF6" at -48.16,43.95 h1 r90; Top Overlay "PA13" at -45.66,43.95 h1 r90; Top Overlay "PA12" at -43.16,43.95 h1 r90; Top Overlay "PB15" at -20.16,43.95 h1 r90; Top Overlay "PB14" at -17.66,43.95 h1 r90; Top Overlay "PB13" at -15.16,43.95 h1 r90; Top Overlay "GND" at -12.66,-2.55 h1 r90; Top Overlay "PB12" at -15.16,-2.55 h1 r90; Top Overlay "PB11" at -17.6,-2.6 h1 r90; Top Overlay "PB1" at -25.2,-2.5 h1 r90; Top Overlay "PB0" at -27.8,-2.5 h1 r90; Top Overlay "PC5" at -30.3,-2.5 h1 r90; Top Overlay "PC4" at -32.8,-2.5 h1 r90; Top Overlay "3V" at -93.66,-2.55 h1 r90; Top Overlay "GND" at -91.16,-2.55 h1 r90; Top Overlay "VBAT" at -88.66,-2.55 h1 r90; Top Overlay "PC13" at -86.16,-2.55 h1 r90; Top Overlay "PC14" at -83.66,-2.55 h1 r90; Top Overlay "PC15" at -81.16,-2.55 h1 r90; Top Overlay "PF0" at -78.66,-2.55 h1 r90; Top Overlay "PF1" at -76.16,-2.55 h1 r90; Top Overlay "GND" at -73.66,-2.55 h1 r90; Top Overlay "NRST" at -71.16,-2.55 h1 r90; Top Overlay "PC0" at -68.66,-2.55 h1 r90; Top Overlay "PC1" at -66.16,-2.55 h1 r90; Top Overlay "PC2" at -63.16,-2.55 h1 r90; Top Overlay "PC3" at -60.66,-2.55 h1 r90; Top Overlay "PA0" at -58.16,-2.55 h1 r90; Top Overlay "PA1" at -55.66,-2.55 h1 r90; Top Overlay "PA2" at -53.16,-2.55 h1 r90; Top Overlay "PA3" at -50.66,-2.55 h1 r90; Top Overlay "PF4" at -48.1,-2.4 h1 r90; Top Overlay "PF5" at -45.6,-2.5 h1 r90; Top Overlay "PA4" at -42.9,-2.5 h1 r90; Top Overlay "PA5" at -40.1,-2.5 h1 r90; Top Overlay "PA6" at -37.9,-2.5 h1 r90; Top Overlay "PA7" at -35.3,-2.5 h1 r90; Top Overlay "GND" at -12.66,43.95 h1 r90; Top Overlay "PC6" at -22.66,43.95 h1 r90; Top Overlay "PC7" at -25.16,43.95 h1 r90; Top Overlay "PC8" at -27.66,43.95 h1 r90; Top Overlay "PC9" at -30.16,43.95 h1 r90; Top Overlay "PA10" at -38.16,43.95 h1 r90; Top Overlay "PA11" at -40.66,43.95 h1 r90; Top Overlay "PA14" at -53.16,43.95 h1 r90; Top Overlay "PA15" at -55.66,43.95 h1 r90